# EAGLE board VibrationDrive (EAGLE 7.2.0)
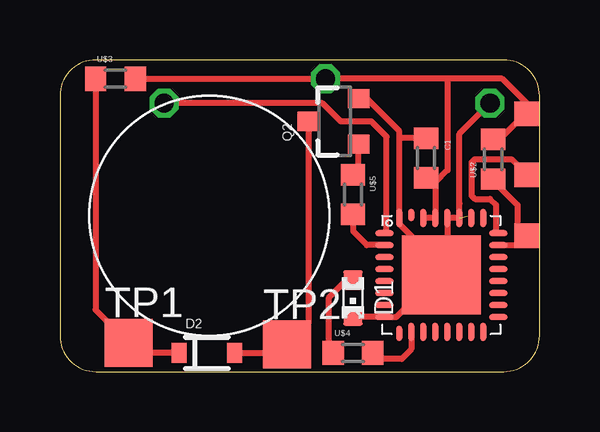
[diagram p0: board, top side]
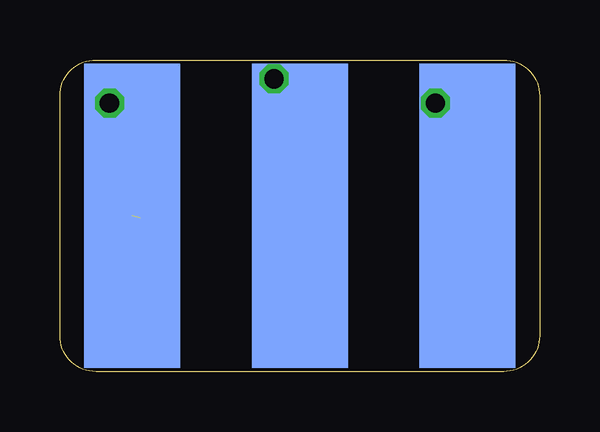
[diagram p1: board, bottom side, seen from below]

Size 20 x 13 mm. Coordinates in mm from the lower left corner, seen from the top.
Copper layers (1*16): Top 0.035mm / dielectric 1.5mm / Bottom 0.035mm
Design rules "Bilex DRU *": minimum track width 10mil, minimum drill 24mil, track to track 10mil, track to pad 10mil, pad to pad 10mil, via to via 10mil, smd to smd 10mil, copper to edge 1mil, drill to drill 8mil, minimum pad ring 10mil, minimum via ring 8mil, stop-mask expansion 4mil, vias tented up to drill 0mil, thermal gap 10mil

## Footprints (pad centres in the part's own frame; a part is rotated, then mirrored left to right if it is on the bottom)
603 = smd 0.889 x 1.016: 1 -0.826,0; 2 0.826,0
LED_0603 = smd 0.8 x 0.8: A 0,-0.75; C 0,0.75
SOD-323 = smd 0.63 x 0.83: A 1.15,0; C -1.15,0
SOT23-3 = smd 0.8 x 0.9: 1 -0.95,-1; 2 0.95,-1; 3 0,1.1
TP20SQ = smd 2 x 2: TP 0,0
CARRIER_SMD2_3POL = smd 4 x 12.7 bottom: GND -6.985,0; RX/TX 6.985,0; VCC 0,0 | smd 1.016 x 1.016: RST -9.461,0.826; TST -9.461,-1.714; VCC'' -9.461,-4.255
QFN32 = smd 0.762 x 0.254: 1 -2.375,1.75; 2 -2.375,1.25; 3 -2.375,0.75; 4 -2.375,0.25; 5 -2.375,-0.25; 6 -2.375,-0.75; 7 -2.375,-1.25; 8 -2.375,-1.75; 17 2.375,-1.75; 18 2.375,-1.25; 19 2.375,-0.75; 20 2.375,-0.25; 21 2.375,0.25; 22 2.375,0.75; 23 2.375,1.25; 24 2.375,1.75 | smd 0.254 x 0.635: 9 -1.75,-2.438 | smd 0.254 x 0.762: 10 -1.25,-2.375; 11 -0.75,-2.375; 12 -0.25,-2.375; 13 0.25,-2.375; 14 0.75,-2.375; 15 1.25,-2.375; 16 1.75,-2.375; 25 1.75,2.375; 26 1.25,2.375; 27 0.75,2.375; 28 0.25,2.375; 29 -0.25,2.375; 30 -0.75,2.375; 32 -1.75,2.375 | smd 0.254 x 0.508: 31 -1.25,2.5 | smd 3.302 x 3.302: TP 0,0

## Placement (x,y rotation side)
C1  100n  [603]  15.27,8.91 90 top
D1  LED-0603  [LED_0603]  12.22,3.07 180 top
D2  250mA/100V  [SOD-323]  6.12,0.78 0 top
Q2  MMBT5088  [SOT23-3]  11.46,10.43 90 top
TP1  TPTP20SQ  [TP20SQ]  2.86,1.21 0 top
TP2  TPTP20SQ  [TP20SQ]  9.46,1.13 0 top
U$1  CARRIER_SMD2SMD2_3POL  [CARRIER_SMD2_3POL]  10,6.5 180 top
U$2  10k  [603]  18.06,8.86 90 top
U$3  100  [603]  2.31,12.21 0 top
U$4  100  [603]  12.22,0.78 0 top
U$5  10k  [603]  12.22,7.39 270 top
U$10  MSP430G2553  [QFN32]  15.9,4.03 0 top

## Library data of the parts
C1 U$1-U$5 U$10 = thar
D1 = we-opto
D2 = SparkFun-DiscreteSemi; PROD_ID: DIO-09646
Q2 = SparkFun-DiscreteSemi; PROD_ID: TRANS-11160
TP1 TP2 = testpad

## Nets
GND: C1.2 D1.C Q2.2 U$1.GND U$10.8 U$10.27 U$10.28 U$10.32 U$10.TP
N$2: D2.A Q2.3 TP2.TP
N$3: U$1.TST U$10.24
N$4: U$1.RST U$2.1 U$10.23
N$5: Q2.1 U$5.1
N$6: U$5.2 U$10.2
N$7: D2.C TP1.TP U$3.1
N$11: D1.A U$4.1
N$12: U$1.RX/TX U$10.1
N$13: U$4.2 U$10.10
VCC: C1.1 U$1.VCC U$1.VCC'' U$2.2 U$3.2 U$10.29 U$10.30

## Tracks (layer width: path | path; a pad name or v marks a point on that pad's centre or on a via)
GND  (via drill 0.8)  (1 unrouted)
  Top 0.254: 16.43,4.35 16.19,5.38 16.16,5.35 | 16.43,4.35 16.48,3.06 U$10.TP 15.01,2.94 14.89,3.14 14.03,2.28 U$10.8 12.22,2.28 D1.C | 16.15,4.72 U$10.28 U$10.27 16.65,6.99 16.66,7.01 16.66,9.93 v17.93,11.2 | 16.15,4.72 16.15,4.42 16.43,4.35 | 16.15,4.72 15.52,5.35 14.76,5.55 14.15,6.16 U$10.32 14.15,9.74 | 15.25,9.51 15.27,9.78 C1.2 14.15,9.74 | 14.15,9.74 14.15,10.03 12.79,11.38 Q2.2
  Bottom 0.254: 18,6.5 18,11.13 v17.93,11.2
N$2
  Top 0.254: Q2.3 10.36,2.02 TP2.TP 9.12,0.78 D2.A
N$3
  Top 0.254: 19.61,7.88 19.46,8.02 19.5,8.18 U$1.TST | U$10.24 18.19,5.78 18.19,6.95 17.93,7.21 17.3,7.21 17.17,7.33 17.17,8.73 17.3,8.86 18.82,8.86 19.3,8.38 U$1.TST | U$1.TST
N$4
  Top 0.254: 19.46,5.48 19.5,5.38 19.46,5.42 U$1.RST | 19.46,5.48 19.5,5.69 19.08,5.74 19.08,6.95 18.06,7.97 U$2.1 | U$10.23 19.28,5.28 19.46,5.48
N$5
  Top 0.254: U$5.1 12.46,8.21 Q2.1
N$6
  Top 0.254: U$10.2 12.8,5.28 12.22,5.86 U$5.2
N$7
  Top 0.254: U$3.1 1.49,2.58 TP1.TP 3.28,0.78 D2.C
N$11
  Top 0.254: D1.A 11.95,3.82 11.2,3.07 11.2,0.97 U$4.1
N$12  (via drill 0.8)
  Top 0.254: U$10.1 13.62,5.78 13.62,9.8 12.98,10.43 11.71,10.43 10.95,11.2 v4.35,11.2
  Bottom 0.254: v4.35,11.2 3.58,6.82 3.4,6.75 3.14,6.5 U$1.RX/TX
N$13
  Top 0.254: U$10.10 14.65,0.93 14.25,0.53 13.3,0.53 U$4.2
VCC  (via drill 0.8)
  Top 0.254: U$10.29 | 16.16,12.21 16.16,8.4 15.65,7.89 | 15.65,7.89 U$10.29 | 15.65,7.89 15.46,7.89 C1.1 | U$10.29 U$10.30 | 19.5,10.52 19.46,10.56 | U$2.2 18.12,9.48 19.2,10.56 19.2,10.51 19.46,10.56 | 19.46,10.56 19.65,10.75 19.65,11.01 18.44,12.21 16.16,12.21 | 19.46,10.56 U$1.VCC'' | 16.16,12.21 11.2,12.21 11.08,12.34 v11.08,12.21 U$3.2
  Bottom 0.254: U$1.VCC 10,11.39 v11.08,12.21